# Altium PCB PMW3389_Rev1.PcbDoc
Units mm, origin at the board's own origin, x right, y up, seen from the top; angles counter-clockwise.
Board outline 22 x 22 mm, 2 copper layers (Top Layer, Bottom Layer); 11 components, 11 nets, 44 pads, 6 vias.
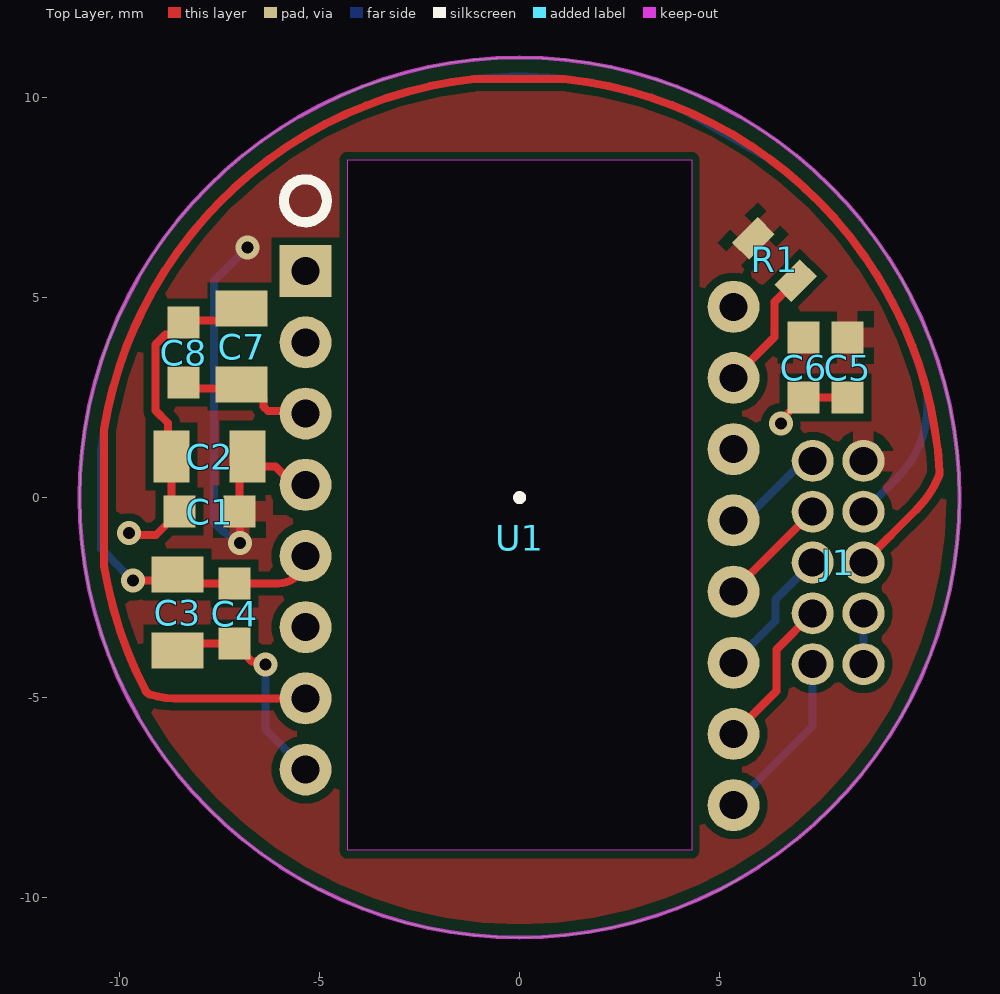
[diagram p0: Top Layer view]
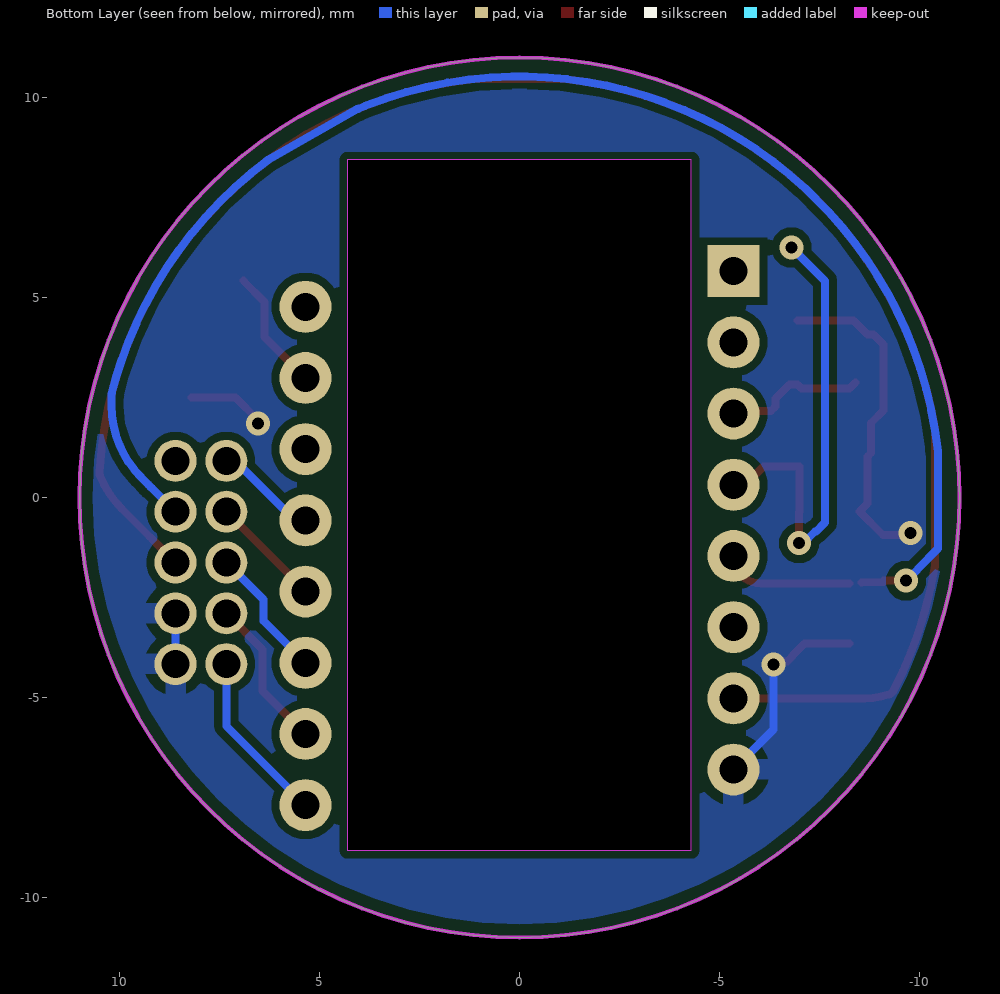
[diagram p1: Bottom Layer view, seen from below]
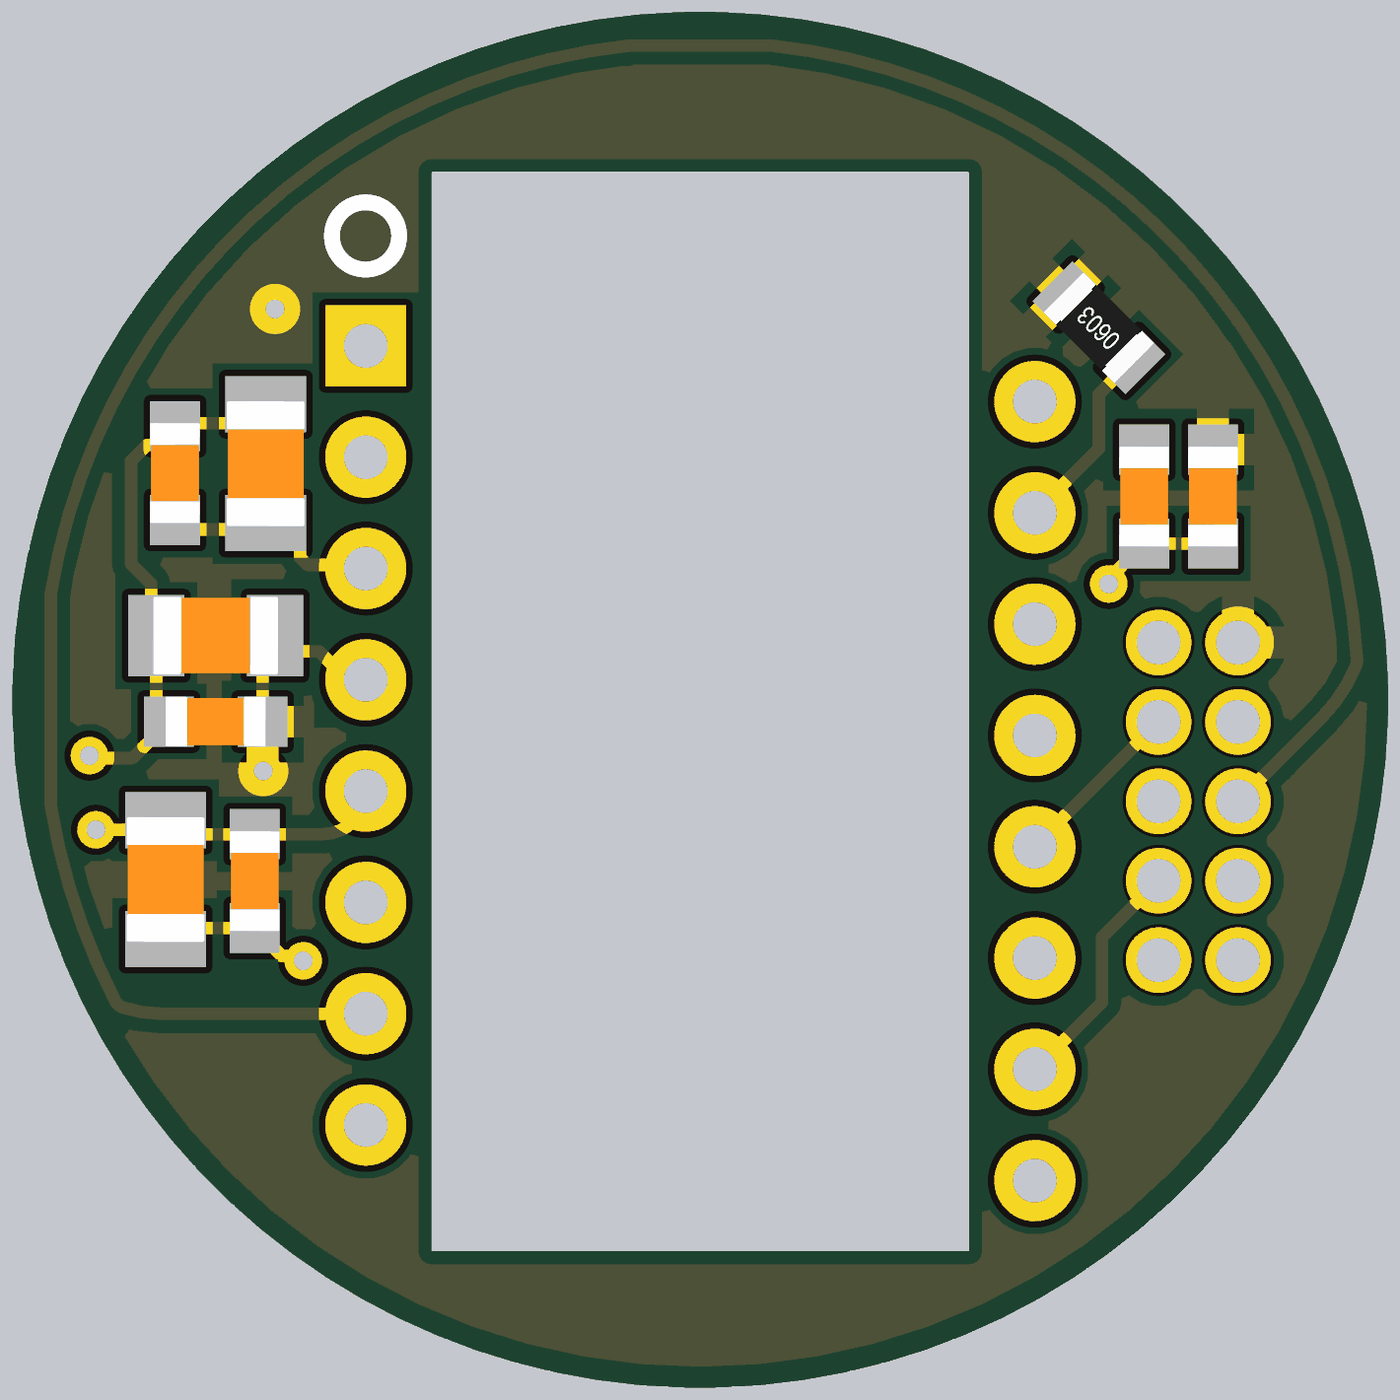
[diagram p2: 3D render of the assembled board from above, using the file's embedded part models]

## Layer stack, top to bottom
Top Solder: solder mask 0.0102, Solder Resist, Dk 3.5
Top Layer: signal copper 0.0356
Dielectric 1: dielectric 0.32, FR-4, Dk 4.8
Bottom Layer: signal copper 0.0356
Bottom Solder: solder mask 0.0102, Solder Resist, Dk 3.5

## Board outline
-11,0 ccw(c0,0) 0,-11 ccw(c0,0) 11,0 ccw(c0,0) 0,11 ccw(c0,0)

## Design rules (kind name [scope] priority, off if disabled: settings)
BoardOutlineClearance [All] p1: gap=0.2 ignorepadtopadclearanceinfootprint=FALSE except(0.4: Arc-SplitBarrior Arc-SplitContinuation Track-SplitBarrior Track-SplitContinuation SMDPad-SplitBarrior SMDPad-SplitContinuation THPad-SplitBarrior THPad-SplitContinuation Via-SplitBarrior Via-SplitContinuation Fill-SplitBarrior Fill-SplitContinuation Poly-SplitBarrior Poly-SplitContinuation Region-SplitBarrior Region-SplitContinuation Text-SplitBarrior Text-SplitContinuation)
Clearance "Clearance Bottom Layer" [OnLayer('Bottom Layer')] p1: gap=0.203 ignorepadtopadclearanceinfootprint=TRUE except(0.254: Arc-Text Track-Text SMDPad-Text THPad-Text Via-Text Fill-Text Poly-Text Region-Text Text-Text)
Clearance "Clearance Top Layer" [OnLayer('Top Layer')] p2: gap=0.203 ignorepadtopadclearanceinfootprint=TRUE except(0.254: Arc-Text Track-Text SMDPad-Text THPad-Text Via-Text Fill-Text Poly-Text Region-Text Text-Text)
Clearance [All] p3: gap=0.2 ignorepadtopadclearanceinfootprint=FALSE except(0.089: Arc-Arc Arc-Track Arc-SMDPad Track-Track Track-SMDPad SMDPad-SMDPad; 0.127: Arc-Via Track-Via SMDPad-Via THPad-Via Via-Via; 0.254: Arc-Text Track-Text SMDPad-Text THPad-Text Via-Text Fill-Text Poly-Text Region-Text Text-Text)
HoleSize [All] p1: absolutevalues=TRUE maxlimit=6.3 minlimit=0.2 maxpercent=80.000 minpercent=20.000
MinimumAnnularRing [All] p1: minimumring=0.076
MinimumSolderMaskSliver [All] p1: minsoldermaskwidth=0.1
PolygonConnect PolygonConnect_1 [All] p1: thpad.connectstyle=Relief thpad.reliefconductorwidth=0.508 thpad.reliefentries=4 thpad.polygonreliefangle="90 Angle" thpad.airgapwidth=0.254 smdpad.connectstyle=Relief smdpad.reliefconductorwidth=0.508 smdpad.reliefentries=4 smdpad.polygonreliefangle="90 Angle" smdpad.airgapwidth=0.254 via.connectstyle=Direct via.reliefconductorwidth=0.508 via.reliefentries=4 via.polygonreliefangle="90 Angle" via.airgapwidth=0.254
RoutingCorners [All] p1: cornerstyle=Round minsetback=2.54 maxsetback=2.54
RoutingVias [All] p1: holewidth=0.5 width=1 viastyle="Through Hole" minholewidth=0.2 minwidth=0.45 maxholewidth=1 maxwidth=2
SilkToSilkClearance [All] p1: silktosilkclearance=0.1
SilkToSolderMaskClearance [IsPad] p1: minsilkscreentomaskgap=0.1 clearancetoexposedcopper=TRUE
SolderMaskExpansion [All] p1: expansion=0.102 istentingtop=FALSE
Width [All] p1: maxlimit=2.54 minlimit=0.089 preferedwidth=0.381
25 further rules are at their usual default settings.

## Components (designator, comment, footprint, x,y, rotation, side; value= is the part's Value field where it differs from the comment)
C1 "02016D104KAT2A" C0603 -7.75,-0.35 r0 top value=100nF
C2 "08053C105KAT2A" C0805 -7.75,1.025 r0 top value=10uF
C3 "08053C105KAT2A" C0805 -8.55,-2.875 r90 top value=10uF
C4 "02016D104KAT2A" C0603 -7.125,-2.9 r90 top value=100nF
C5 "02016D104KAT2A" C0603 8.2,3.25 r90 top value=100nF
C6 "02016D104KAT2A" C0603 7.1,3.25 r90 top value=100nF
C7 "08053C105KAT2A" C0805 -6.95,3.775 r270 top value=4.7uF
C8 "02016D104KAT2A" C0603 -8.4,3.625 r270 top value=100nF
J1 "10 pin header" "10 pin header" 7.33,-4.165 r0 top
R1 "CPF-A-0603B100KE1" R0603 6.375,5.95 r135 top value=13R
U1 "PMW3389" PMW3389 0,0 r90 top

## Footprints (in the part's own frame and the unit in brackets; to place one, negate y for a bottom-side part, rotate by r counter-clockwise, add the part's x,y. Pads: shape width x height; smd on the part's side, far side on the other; paste and mask are expansions set on the pad)
"10 pin header" [mm]
  round 1.05 hole 0.7 mask+0.05: 1(0,5.08) 2(1.27,5.08) 3(0,3.81) 4(1.27,3.81) 5(0,2.54) 6(1.27,2.54) 7(0,1.27) 8(1.27,1.27) 9(0,0) 10(1.27,0)
C0603 [mm]
  rect 0.8x0.8 smd: 1(-0.75,0) 2(0.75,0)
  body extent -0.8,-0.4 0.8,0.4, height 0.8
C0805 [mm]
  rect 0.9x1.3 smd: 1(-0.95,0) 2(0.95,0)
  body extent -1,-0.62 1,0.62, height 0.8
PMW3389 [mm] "PMW3389"
  rect 1.3x1.3 hole 0.7: 1(5.659,5.349)
  round 1.3 hole 0.7: 2(3.879,5.349) 3(2.099,5.349) 4(0.319,5.349) 5(-1.461,5.349) 6(-3.241,5.349) 7(-5.021,5.349) 8(-6.801,5.349) 9(-7.691,-5.351) 10(-5.911,-5.351) 11(-4.131,-5.351) 12(-2.351,-5.351) 13(-0.571,-5.351) 14(1.209,-5.351) 15(2.989,-5.351) 16(4.769,-5.351)
  Keep-Out Layer board cut-out: 8.439,4.299 8.439,-4.301 -8.821,-4.301 -8.821,4.299
  silkscreen extent -0.04,-0.04 7.95,5.89, body extent -8.29,-4.55 7.91,4.55, height 2.41
R0603 [mm]
  rect 0.6x0.9 smd: 1(-0.75,0) 2(0.75,0)
  body extent -0.8,-0.45 0.8,0.45, height 0.5

## Part data
C1 C4 C8: "C0603"
C2 C3 C7: "C0805"
C5 C6: "Decoupling LED_P."
R1: "Current limiter LED_P"

## Via types
v1: diameter 0.6, hole 0.3, Top Layer to Bottom Layer, 6 vias

## Nets (pads, with @x,y where several pads share a name; then routed paths per layer and width w, separated by ;. In a path a pad name is that pad's centre, name@x,y a point inside that pad or via, vN(x,y) a via of type N, cw(c..) or ccw(c..) an arc to the next point about the centre after c; other vN are vias at no path point)
1V9: C1.2 C2.2 C5.2 C6.2 J1.2 R1.2 U1.4 | length 11.8
  Top Layer w0.2: v1(-6.989,-1.14) -6.989,-0.361 C1.2 -7,0.775 -6.103,0.775 -5.647,0.319 U1.4
  Bottom Layer w0.2: v1(-6.989,-1.14) -7.097,-1.14 -7.382,-0.855 -7.411,-0.855 -7.64,-0.627 -7.64,5.41 v1(-6.8,6.25)
3V3: C3.2 C4.2 J1.4 U1.5 | length 40.8
  Top Layer w0.2: v1(-9.664,-2.08) -9.1,-2.08 -9.1,-2.113 C3.2@-8.55,-2.125 ; C3.2@-8.25,-2.15 C4.2 -6.038,-2.15 ccw(c-6.038,-1.461) U1.5
  Bottom Layer w0.2: v1(-9.664,-2.08) -9.669,-2.08 -9.953,-1.796 -10.461,-1.277 -10.461,1.137 cw(c-10.261,1.136) -10.46,1.157 cw(c0,0) -9.843,3.724 cw(c0,0) -7.737,7.134 cw(c-7.591,6.998) -7.733,7.138 -7.136,7.735 cw(c0,0) -2.656,10.183 cw(c0,0) -0.188,10.522 0.191,10.522 cw(c0,0) 3.861,9.79 4.007,9.723 cw(c3.983,9.525) 4.058,9.71 6.296,8.433 cw(c0,0) 9.781,3.884 cw(c0,0) 10.194,2.615 cw(c10,2.566) 10.2,2.567 10.2,2.297 cw(c7.66,2.297) 9.456,0.501 9.281,0.326 ccw(c9.423,0.185) 9.274,0.319 cw(c8.6,0.915) 9.196,0.241 ccw(c9.33,0.092) 9.189,0.234 J1.4
GND: C1.1 C2.1 C3.1 C4.1 C5.1 C6.1 C7.1 C8.1 J1.8 J1.10 U1.8 | length 16.8
  Top Layer w0.2: v1(-9.768,-0.893) -9.729,-0.933 -9.083,-0.933 C1.1 -8.7,-0.15 C2.1 -8.783,1.108 -8.783,1.858 -9.103,2.178 -9.103,3.822 -8.85,4.075 -8.7,4.075 -8.35,4.425 C7.1@-6.95,4.425 ; C3.1@-8.25,-3.65 C4.1 -6.825,-3.95 -6.825,-3.967 -6.694,-4.098 -6.427,-4.098 v1(-6.35,-4.175) ; v1(6.533,1.852) 6.533,1.933 C6.1 C5.1
  Bottom Layer w0.2: v1(-6.35,-4.175) -6.35,-5.8 U1.8 ; J1.10 J1.8
MISO: J1.3 U1.12 | length 2.8
  Top Layer w0.2: U1.12 5.351,-2.331 7.327,-0.355 J1.3
MOSI: J1.5 U1.11 | length 3.3
  Bottom Layer w0.2: U1.11 6.4,-3.082 6.4,-2.552 7.327,-1.625 J1.5
MOTION: J1.9 U1.9 | length 4.3
  Bottom Layer w0.2: U1.9 7.33,-5.712 J1.9
NCS: J1.1 U1.13 | length 2.6
  Bottom Layer w0.2: U1.13 5.614,-0.571 7.1,0.915 J1.1
NetC7_2: C7.2 C8.2 U1.3 | length 3.6
  Top Layer w0.2: C8.2 -8.25,2.725 -7.05,2.725 C7.2 -6.75,2.825 -6.4,2.475 -6.4,2.275 -6.283,2.158 -5.408,2.158 U1.3
NetJ1_6: J1.6 U1.7 | length 44.5
  Top Layer w0.2: U1.7 -8.624,-5.021 cw(c-8.624,-3.085) -9.24,-4.92 -9.241,-4.92 cw(c-9.176,-4.731) -9.353,-4.824 cw(c0,0) -10.384,-1.71 cw(c-10.186,-1.679) -10.386,-1.681 -10.386,1.696 cw(c0,0) -7.139,7.732 cw(c0,0) -1.129,10.463 cw(c-1.109,10.264) -1.11,10.464 1.119,10.464 cw(c0,0) 8.573,6.104 cw(c8.41,5.988) 8.6,6.05 cw(c8.478,5.892) 8.641,6.007 cw(c0,0) 10.138,2.825 cw(c0,0) 10.505,0.638 cw(c10.305,0.626) 10.491,0.553 cw(c8.135,1.502) 9.931,-0.294 9.281,-0.944 ccw(c9.423,-1.085) 9.274,-0.951 cw(c8.6,-0.355) 9.196,-1.029 ccw(c9.33,-1.178) 9.189,-1.036 J1.6
NetR1_1: R1.1 U1.15 | length 3.1
  Top Layer w0.2: U1.15 6.375,4.013 6.375,4.889 R1.1
SCLK: J1.7 U1.10 | length 3.8
  Top Layer w0.2: U1.10 6.425,-4.837 6.425,-3.797 7.327,-2.895 J1.7
pads on no net: U1.1 U1.2 U1.6 U1.14 U1.16

## Polygon pours and split planes (outlines as drawn)
1V9 on Top Layer "1V9_L01_P001" (solid, pour order 1): 11.375,11.4 11.375,-11.375 -11.375,-11.375 -11.375,11.4
GND on Bottom Layer "GND_L02_P000" (solid, pour order 0): 11.375,11.4 11.375,-11.375 -11.375,-11.375 -11.375,11.4

## Keep-outs
Keep-Out Layer:
  circle w0.1: c0,0 r11

## Other copper
Top Layer:
  pour cut-out: -5.445,0.316 -5.413,0.284 -5.413,-0.449 -6.175,-0.449 -6.175,1.075 -4.651,1.075 -4.651,-0.449 -5.413,-0.449

## Silkscreen, mask and mechanical layers (free items; w line width, h text height)
Mechanical 1:
  circle w0.1: c0,0 r11